# Altium PCB M2Sdurt.PcbDoc
Units mil, origin at the board's own origin, x right, y up, seen from the top; angles counter-clockwise.
Board outline 1082.68 x 1574.8 mil, 2 copper layers (Top Layer, Bottom Layer); 47 components, 22 nets, 252 pads, 107 vias.
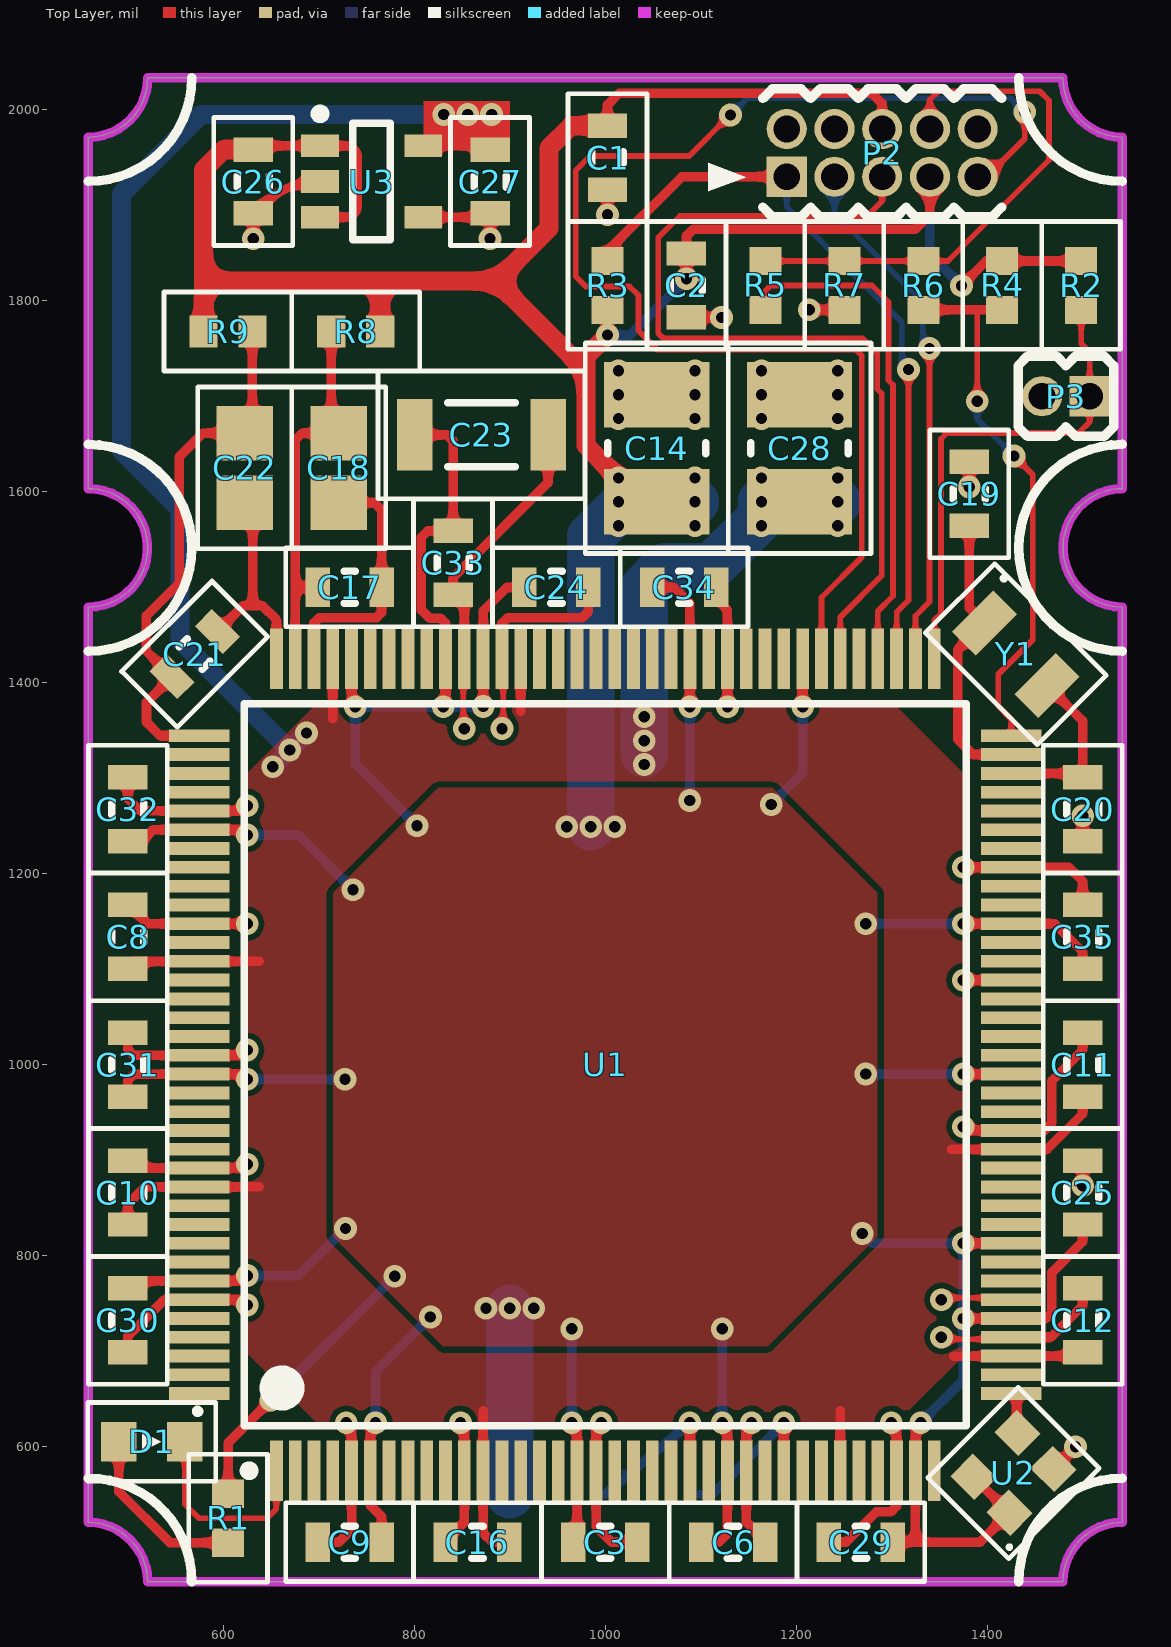
[diagram p0: Top Layer view]
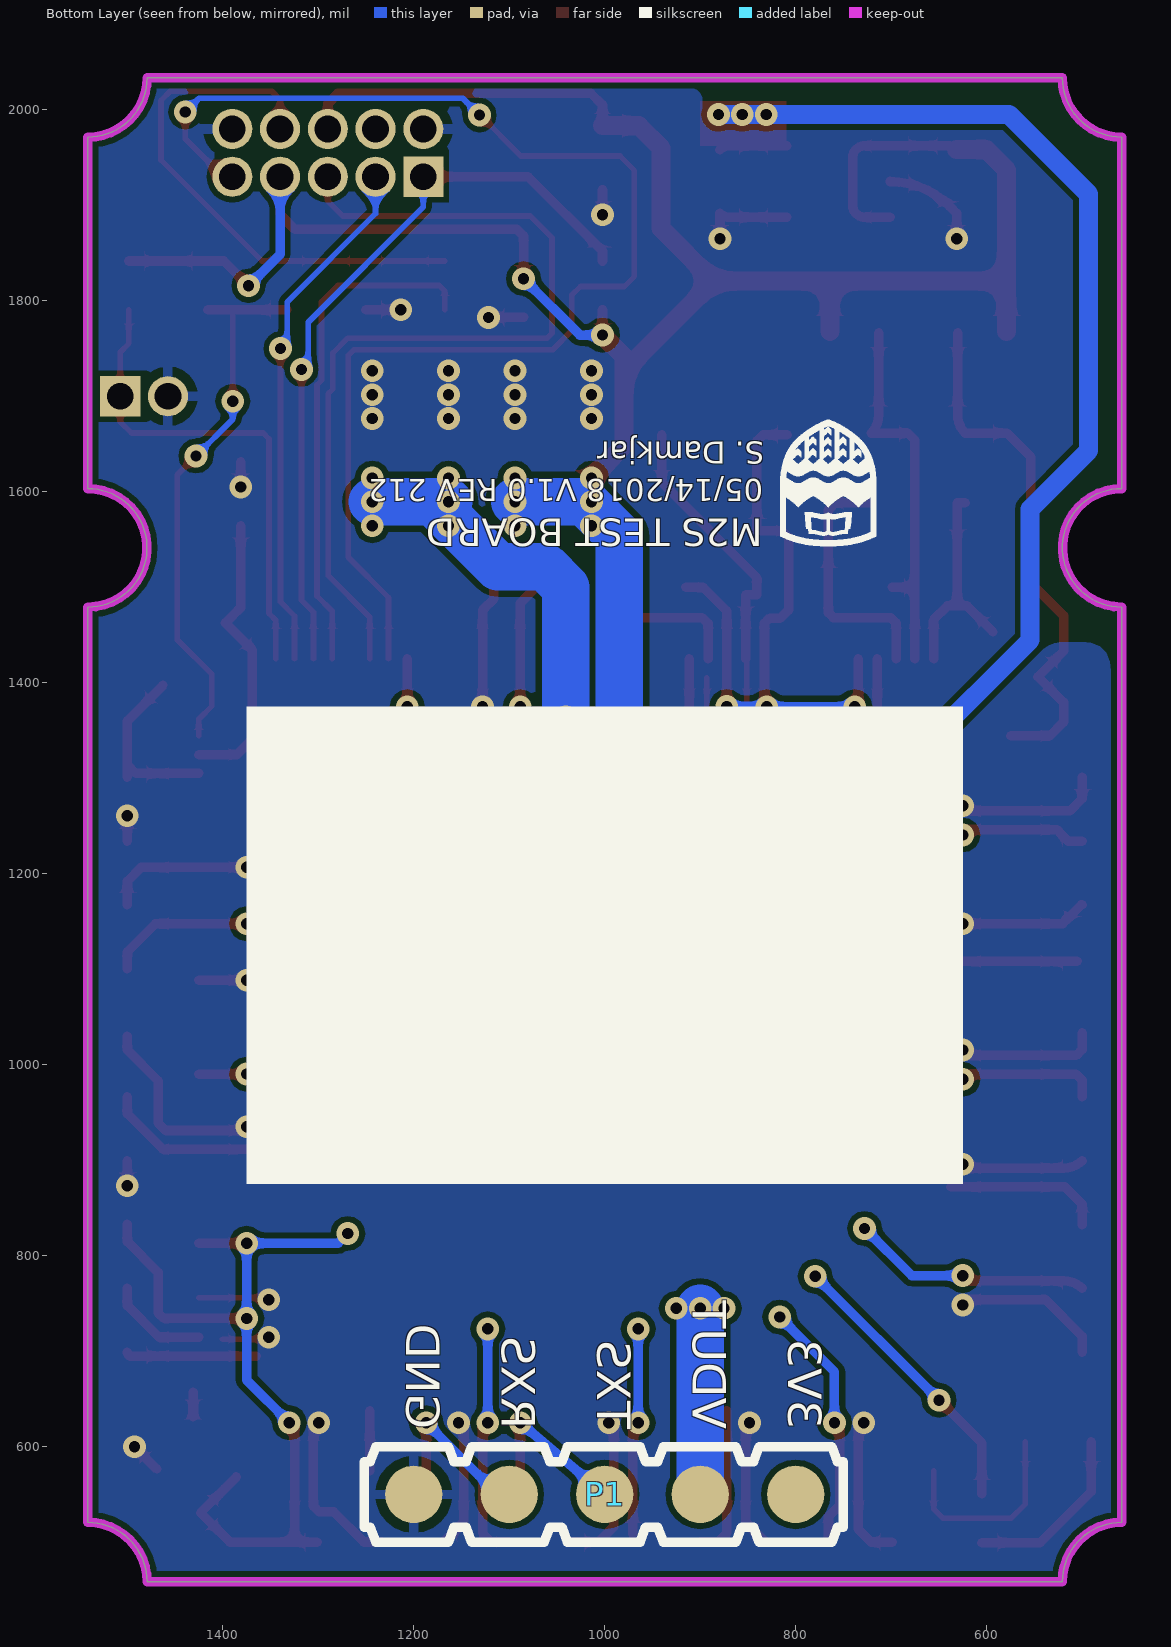
[diagram p1: Bottom Layer view, seen from below]

## Layer stack, top to bottom
Top Solder: solder mask 0.4, Solder Resist, Dk 3.5
Top Layer: signal copper 1.4
Dielectric 1: dielectric 12.6, FR-4, Dk 4.8
Bottom Layer: signal copper 1.4
Bottom Solder: solder mask 0.4, Solder Resist, Dk 3.5

## Board outline
458.66,520.67 458.66,1479.33 ccw(c458.66,1541.34) 458.66,1603.35 458.66,1971.46 ccw(c458.66,2033.46) 520.67,2033.46 1479.33,2033.46 ccw(c1541.34,2033.46) 1541.34,1971.46 1541.34,1603.35 ccw(c1541.34,1541.34) 1541.34,1479.33 1541.34,520.67 ccw(c1541.34,458.66) 1479.33,458.66 520.67,458.66 ccw(c458.66,458.66)

## Design rules (kind name [scope] priority, off if disabled: settings)
AcuteAngle [All] p1: minimum=6.00000000000000E+0001 checktracksonly=FALSE
BoardOutlineClearance [All] p1: gap=7.87 ignorepadtopadclearanceinfootprint=FALSE
Clearance [All] p1: gap=6 ignorepadtopadclearanceinfootprint=FALSE except(0: Arc-Hole Track-Hole SMDPad-Hole THPad-Hole Via-Hole Fill-Hole Poly-Hole Region-Hole Text-Hole)
Clearance ClearanceTop [OnLayer('Component Side')] p2 off: gap=4 ignorepadtopadclearanceinfootprint=FALSE except(0: Arc-Hole Track-Hole SMDPad-Hole THPad-Hole Via-Hole Fill-Hole Poly-Hole Region-Hole Text-Hole)
Clearance ClearanceTop_1 [OnLayer('Signal Layer 1')] p3 off: gap=4 ignorepadtopadclearanceinfootprint=FALSE except(0: Arc-Hole Track-Hole SMDPad-Hole THPad-Hole Via-Hole Fill-Hole Poly-Hole Region-Hole Text-Hole)
Clearance ClearanceTop_2 [OnLayer('Signal Layer 2')] p4 off: gap=4 ignorepadtopadclearanceinfootprint=FALSE except(0: Arc-Hole Track-Hole SMDPad-Hole THPad-Hole Via-Hole Fill-Hole Poly-Hole Region-Hole Text-Hole)
Clearance ClearanceBottom [OnLayer('Solder Side')] p5 off: gap=4 ignorepadtopadclearanceinfootprint=FALSE except(0: Arc-Hole Track-Hole SMDPad-Hole THPad-Hole Via-Hole Fill-Hole Poly-Hole Region-Hole Text-Hole)
Height HeightTop [OnLayer('Component Side')] p1: minheight=0 maxheight=1000 prefheight=157.48
Height HeightBottom [OnLayer('Solder Side')] p2: minheight=0 maxheight=157.48 prefheight=157.48
HoleSize [All] p1: absolutevalues=TRUE maxlimit=255.91 minlimit=7.87 maxpercent=80.000 minpercent=20.000
MinimumAnnularRing [All] p1: minimumring=4
MinimumSolderMaskSliver [All] p1: minsoldermaskwidth=3.94
PolygonConnect PolygonConnect_1 [IsVia] p1: connectstyle=Direct reliefconductorwidth=10 reliefentries=4 polygonreliefangle="90 Angle" airgapwidth=10
PolygonConnect [All] p2: connectstyle=Relief reliefconductorwidth=10 reliefentries=4 polygonreliefangle="90 Angle" airgapwidth=10
RoutingVias [All] p1: holewidth=8 width=20 viastyle="Through Hole" minholewidth=11.81 minwidth=23.81 maxholewidth=28 maxwidth=50
SMDEntry [All] p1: side=TRUE corner=FALSE anyangle=FALSE
SMDNeckDown [All] p1: percent=90.000
SMDToCorner [All] p1: distance=0
SMDToPlane [All] p1: distance=0
SilkToSilkClearance [All] p1: silktosilkclearance=6
SilkToSolderMaskClearance [IsPad] p1: minsilkscreentomaskgap=5.12 clearancetoexposedcopper=TRUE
SolderMaskExpansion [All] p1: expansion=0
UnConnectedPin [All] p1:
Width [All] p1: maxlimit=100 minlimit=6 preferedwidth=10 checkconnectedcopper=TRUE
25 further rules are at their usual default settings.

## Components (designator, comment, footprint, x,y, rotation, side; value= is the part's Value field where it differs from the comment)
C1 "Cap" TDK-CGA3E 1002.32,1950 r90 top value=0.1µF
C2 "Cap" TDK-CGA3E 1085,1816.14 r90 top value=0.1µF
C3 "Cap" TDK-CGA3E 1000,500 r180 top value=0.1µF
C6 "Cap" TDK-CGA3E 1133.86,500 r180 top value=0.1µF
C8 "Cap" TDK-CGA3E 500,1133.86 r270 top value=0.1µF
C9 "Cap" TDK-CGA3E 732.28,500 r0 top value=0.1µF
C10 "Cap" TDK-CGA3E 500,866.14 r270 top value=0.1µF
C11 "Cap" TDK-CGA3E 1500,1000 r270 top value=0.1µF
C12 "Cap" TDK-CGA3E 1500,732.28 r270 top value=0.1µF
C14 "Cap" TY-1210M 1053.91,1645.62 r90 top value=47µF
C16 "Cap" TDK-CGA3E 866.14,500 r0 top value=0.1µF
C17 "Cap" TDK-CGA3E 732.28,1500 r180 top value=0.1µF
C18 "Cap" TY-0805G 720.93,1625 r90 top value=22µF
C19 "Cap" TDK-CGA3E 1381.2,1597.92 r270 top value=22pF
C20 "Cap" TDK-CGA3E 1500,1267.72 r90 top value=22pF
C21 "Cap" TDK-CGA3E 570,1430 r225 top value=0.1µF
C22 "Cap" TY-0805G 622.5,1625 r90 top value=22µF
C23 "Cap" TDK-CGA5L 870.3,1659.67 r180 top value=10µF
C24 "Cap" TDK-CGA3E 948.82,1500 r180 top value=10000pF
C25 "Cap" TDK-CGA3E 1500,866.14 r270 top value=0.1µF
C26 "Cap" TDK-CGA3E 631.3,1925 r90 top value=1µF
C27 "Cap" TDK-CGA3E 879.33,1925 r90 top value=1µF
C28 "Cap" TY-1210M 1203.51,1645.62 r90 top value=47µF
C29 "Cap" TDK-CGA3E 1267.72,500 r0 top value=0.1µF
C30 "Cap" TDK-CGA3E 500,732.28 r90 top value=0.1µF
C31 "Cap" TDK-CGA3E 500,1000 r270 top value=0.1µF
C32 "Cap" TDK-CGA3E 500,1267.72 r270 top value=0.1µF
C33 "Cap" TDK-CGA3E 840.55,1525.59 r90 top value=0.1µF
C34 "Cap" TDK-CGA3E 1082.68,1500 r180 top value=0.1µF
C35 "Cap" TDK-CGA3E 1500,1133.86 r270 top value=0.1µF
D1 "LED" WL-150060XS75000 525,605 r0 top value=BLUE
P1 "319-10-105-30-054000" 319-10-105-30-054000 800,550 r0 bottom
P2 "Header 5x2" SLN-GRPB052 1190,1930 r0 top
P3 "Header 2" SLN-GRPB021 1507.39,1700.08 r180 top
R1 "Res3" PANA-ERJ3EK 605,525 r90 top value=10k
R2 "Res3" PANA-ERJ3EK 1498.39,1816.14 r270 top value=1k
R3 "DNP" PANA-ERJ3G 1002.32,1816.14 r90 top
R4 "Res3" PANA-ERJ3EK 1415.71,1816.14 r270 top value=10k
R5 "Jumper" PANA-ERJ3G 1167.68,1816.14 r90 top value=0
R6 "DNP" PANA-ERJ3G 1333.03,1816.14 r90 top
R7 "Res3" PANA-ERJ3EK 1250.35,1816.14 r270 top value=1k
R8 "Res3" PANA-ERJ3EK 738.64,1767.94 r0 top value=10
R9 "Res3" PANA-ERJ3EK 604.78,1767.94 r180 top value=10
U1 "M2S010-TQG144I" USEM-TQ144 1000,1000 r90 top locked
U2 "ASDMB" ABR-ASDMB 1427.5,572.5 r135 top value=10MHz
U3 "LP5907" TI-SOT25 755.32,1925 r0 top value=1.2V
Y1 "ABS07AIG" ABR-ABS07AIG 1430,1430 r315 top value=32.768kHz

## Footprints (in the part's own frame and the unit in brackets; to place one, negate y for a bottom-side part, rotate by r counter-clockwise, add the part's x,y. Pads: shape width x height; smd on the part's side, far side on the other; paste and mask are expansions set on the pad)
319-10-105-30-054000 [mil]
  round 60 smd: 1(0,0) 2(100,0) 3(200,0) 4(300,0) 5(400,0)
  silkscreen extent -50,-50 452,50, body extent -50,-50 450,50, height 87
ABR-ABS07AIG [mm] "DFN, 2-Leads, Body 1.50x3.20mm, Pitch 2.35mm, IPC Low Density"
  rect 0.9x1.55 smd: 1(-1.175,0) 2(1.175,0)
  silkscreen extent -2.1,-1.3 2.1,1.3, body extent -1.65,-0.8 1.65,0.8, height 0.9
ABR-ASDMB [mm] "DFN, 4-Leads, Body 2.00x2.50mm, Pitch 1.65mm, IPC Low Density"
  rect 0.9x0.85 smd: 1(-0.675,0.825) 2(-0.675,-0.825) 3(0.675,-0.825) 4(0.675,0.825)
  silkscreen extent -1.52,-1.7 1.53,1.7, body extent -1,-1.25 1,1.25, height 0.86
PANA-ERJ3EK [mm] "Chip Resistor, 2-Leads, Body 1.60x0.85mm, IPC High Density"
  rect 0.75x0.85 smd: 1(-0.65,0) 2(0.65,0)
  silkscreen extent -1.7,-1.05 1.7,1.05, body extent -0.88,-0.48 0.87,0.48, height 0.55
PANA-ERJ3G [mm] "Chip Resistor, 2-Leads, Body 1.60x0.85mm, IPC High Density"
  rect 0.75x0.85 smd: 1(-0.65,0) 2(0.65,0)
  silkscreen extent -1.7,-1.05 1.7,1.05, body extent -0.88,-0.48 0.87,0.48, height 0.55
SLN-GRPB021 [mil]
  rect 42x42 hole 28: 1(0,0)
  round 42 hole 28: 2(50,0)
  silkscreen extent -25,-42 75,42, body extent -25,-42 75,42, height 130
SLN-GRPB052 [mil]
  rect 42x42 hole 28: 1(0,0)
  round 42 hole 28: 2(0,50) 3(50,0) 4(50,50) 5(100,0) 6(100,50) 7(150,0) 8(150,50) 9(200,0) 10(200,50)
  silkscreen extent -25,-42 225,92, body extent -25,-42 225,92, height 130
TDK-CGA3E [mm] "Chip Capacitor, 2-Leads, Body 1.60x0.80mm, IPC Low Density"
  rect 0.65x1.05 smd: 1(-0.85,0) 2(0.85,0)
  silkscreen extent -1.7,-1.05 1.7,1.05, body extent -0.85,-0.45 0.85,0.45, height 0.8
TDK-CGA5L [mm] "Chip Capacitor, 2-Leads, Body 3.20x1.60mm, IPC Low Density"
  rect 0.95x1.9 smd: 1(-1.775,0) 2(1.775,0)
  silkscreen extent -2.75,-1.7 2.75,1.7, body extent -1.7,-0.9 1.7,0.9, height 1.6
TI-SOT25 [mm] "SOT23, 5-Leads, Body 2.90x2.80mm, Pitch 0.95mm, IPC Medium Density"
  rect 1x0.6 smd: 1(-1.375,0.95) 2(-1.375,0) 3(-1.375,-0.95) 4(1.375,-0.95) 5(1.375,0.95)
  silkscreen extent -1.5,-1.55 0.5,1.92, body extent -0.88,-1.52 0.87,1.53, height 1.45
TY-0805G [mm] "Chip Capacitor, 2-Leads, Body 2.00x1.25mm, IPC Low Density"
  rect 1.45x1.5 smd: 1(-0.925,0) 2(0.925,0)
  silkscreen extent -2.15,-1.25 2.15,1.25, body extent -1.05,-0.67 1.05,0.67, height 1.35
TY-1210M [mm] "Chip Capacitor, 2-Leads, Body 3.20x2.50mm, IPC Low Density"
  rect 1.75x2.8 smd: 1(-1.425,0) 2(1.425,0)
  silkscreen extent -2.8,-1.9 2.8,1.9, body extent -1.75,-1.35 1.75,1.35, height 2.7
USEM-TQ144 [mm] "TSQFP, 144-Leads, Body 20.00x20.00mm, Pitch 0.50mm, IPC Low Density"
  rect 1.6x0.34 smd: 1(-10.8,8.75) 2(-10.8,8.25) 3(-10.8,7.75) 4(-10.8,7.25) 5(-10.8,6.75) 6(-10.8,6.25) 7(-10.8,5.75) 8(-10.8,5.25) 9(-10.8,4.75) 10(-10.8,4.25) 11(-10.8,3.75) 12(-10.8,3.25) 13(-10.8,2.75) 14(-10.8,2.25) 15(-10.8,1.75) 16(-10.8,1.25) 17(-10.8,0.75) 18(-10.8,0.25) 19(-10.8,-0.25) 20(-10.8,-0.75) 21(-10.8,-1.25) 22(-10.8,-1.75) 23(-10.8,-2.25) 24(-10.8,-2.75) 25(-10.8,-3.25) 26(-10.8,-3.75) 27(-10.8,-4.25) 28(-10.8,-4.75) 29(-10.8,-5.25) 30(-10.8,-5.75) 31(-10.8,-6.25) 32(-10.8,-6.75) 33(-10.8,-7.25) 34(-10.8,-7.75) 35(-10.8,-8.25) 36(-10.8,-8.75) 73(10.8,-8.75) 74(10.8,-8.25) 75(10.8,-7.75) 76(10.8,-7.25) 77(10.8,-6.75) 78(10.8,-6.25) 79(10.8,-5.75) 80(10.8,-5.25) 81(10.8,-4.75) 82(10.8,-4.25) 83(10.8,-3.75) 84(10.8,-3.25) 85(10.8,-2.75) 86(10.8,-2.25) 87(10.8,-1.75) 88(10.8,-1.25) 89(10.8,-0.75) 90(10.8,-0.25) 91(10.8,0.25) 92(10.8,0.75) 93(10.8,1.25) 94(10.8,1.75) 95(10.8,2.25) 96(10.8,2.75) 97(10.8,3.25) 98(10.8,3.75) 99(10.8,4.25) 100(10.8,4.75) 101(10.8,5.25) 102(10.8,5.75) 103(10.8,6.25) 104(10.8,6.75) 105(10.8,7.25) 106(10.8,7.75) 107(10.8,8.25) 108(10.8,8.75)
  rect 0.34x1.6 smd: 37(-8.75,-10.8) 38(-8.25,-10.8) 39(-7.75,-10.8) 40(-7.25,-10.8) 41(-6.75,-10.8) 42(-6.25,-10.8) 43(-5.75,-10.8) 44(-5.25,-10.8) 45(-4.75,-10.8) 46(-4.25,-10.8) 47(-3.75,-10.8) 48(-3.25,-10.8) 49(-2.75,-10.8) 50(-2.25,-10.8) 51(-1.75,-10.8) 52(-1.25,-10.8) 53(-0.75,-10.8) 54(-0.25,-10.8) 55(0.25,-10.8) 56(0.75,-10.8) 57(1.25,-10.8) 58(1.75,-10.8) 59(2.25,-10.8) 60(2.75,-10.8) 61(3.25,-10.8) 62(3.75,-10.8) 63(4.25,-10.8) 64(4.75,-10.8) 65(5.25,-10.8) 66(5.75,-10.8) 67(6.25,-10.8) 68(6.75,-10.8) 69(7.25,-10.8) 70(7.75,-10.8) 71(8.25,-10.8) 72(8.75,-10.8) 109(8.75,10.8) 110(8.25,10.8) 111(7.75,10.8) 112(7.25,10.8) 113(6.75,10.8) 114(6.25,10.8) 115(5.75,10.8) 116(5.25,10.8) 117(4.75,10.8) 118(4.25,10.8) 119(3.75,10.8) 120(3.25,10.8) 121(2.75,10.8) 122(2.25,10.8) 123(1.75,10.8) 124(1.25,10.8) 125(0.75,10.8) 126(0.25,10.8) 127(-0.25,10.8) 128(-0.75,10.8) 129(-1.25,10.8) 130(-1.75,10.8) 131(-2.25,10.8) 132(-2.75,10.8) 133(-3.25,10.8) 134(-3.75,10.8) 135(-4.25,10.8) 136(-4.75,10.8) 137(-5.25,10.8) 138(-5.75,10.8) 139(-6.25,10.8) 140(-6.75,10.8) 141(-7.25,10.8) 142(-7.75,10.8) 143(-8.25,10.8) 144(-8.75,10.8)
  silkscreen extent -10.92,-9.6 9.6,9.6, body extent -11,-11 11,11, height 1.6
WL-150060XS75000 [mm] "Chip Diode, 2-Leads, Body 1.60x0.80mm, IPC Low Density"
  rect 0.95x1.05 smd: 1(-0.875,0) 2(0.875,0)
  silkscreen extent -1.7,-1.05 1.7,1.05, body extent -0.8,-0.4 0.8,0.4, height 0.7

## Part data
C1 C2 C3 C6 C8 C9 C10 C11 C12 C16 C17 C21 C25 C29 C30 C31 C32 C33 C34 C35: library part PC-TDK-02272, "CAP CER 0.1UF 50V X8R 0603", Manufacturer Part Number=CGA3E3X8R1H104K080AB, Supplier Part Number 1=445-12606-1-ND, Temperature Coefficient=X8R, Tolerance=±10%, Voltage - Rated=50V, Applications=Automotive, Index=2272, LatestRevisionDate=3/16/2016, LatestRevisionNote=..., PackageDescription="Radial Cap, Thru-Hole; 2 Leads; 0.3 in Pin Spacing", PackageReference="0603 (1608 Metric)", Part Number=PC-TDK-02272, Published=3/16/2016, Publisher=AlbertaSat, Supplier 1=Digi-key, Supplier Link=http://www.digikey.ca/product-search/en?keywords=445-12606-1-ND
C14 C28: library part PC-TY-00765, "CAP CER 47UF 10V X7R 1210", Manufacturer Part Number=LMK325B7476MM-TR, Supplier Part Number 1=587-2783-1-ND, Temperature Coefficient=X7R, Tolerance=±20%, Voltage-Rated=10V, Application="General Purpose", Index=765, LatestRevisionDate=3/13/2016, LatestRevisionNote=..., PackageDescription="Chip Capacitor, 2-Leads, Body 3.20x2.50mm, IPC Low Density", PackageReference="1210 (3225 Metric)", Part Number=PC-TY-00765, Published=3/13/2016, Publisher=AlbertaSat, Supplier 1=Digi-key, Supplier Link=http://www.digikey.ca/product-search/en?keywords=587-2783-1-ND
C18 C22: library part PC-TY-00700, "CAP CER 22UF 16V X5R 0805", Manufacturer Part Number=EMK212BBJ226MG-T, Supplier Part Number 1=587-3239-1-ND, Temperature Coefficient=X5R, Tolerance=±20%, Voltage-Rated=16V, Application="General Purpose", Index=700, LatestRevisionDate=2016-03-13, LatestRevisionNote=..., PackageDescription="Chip Capacitor, 2-Leads, Body 2.00x1.25mm, IPC Low Density", PackageReference="0805 (2012 Metric)", Part Number=PC-TY-00700, Published=2016-03-13, Publisher=AlbertaSat, Supplier 1=Digi-key, Supplier Link=http://www.digikey.ca/product-search/en?keywords=587-3239-1-ND
C19 C20: library part PC-TDK-01150, "CAP CER 22PF 100V NP0 0603", Manufacturer Part Number=CGA3E2NP02A220J080AA, Supplier Part Number 1=445-12357-1-ND, Temperature Coefficient=NP0, Tolerance=±5%, Voltage - Rated=100V, Applications=Automotive, Index=1150, LatestRevisionDate=2016-03-16, LatestRevisionNote=..., PackageDescription="Radial Cap, Thru-Hole; 2 Leads; 0.3 in Pin Spacing", PackageReference="0603 (1608 Metric)", Part Number=PC-TDK-01150, Published=2016-03-16, Publisher=AlbertaSat, Supplier 1=Digi-key, Supplier Link=http://www.digikey.ca/product-search/en?keywords=445-12357-1-ND
C23: library part PC-TDK-02917, "CAP CER 10UF 25V X7R 1206", Manufacturer Part Number=CGA5L1X7R1E106K160AC, Supplier Part Number 1=445-6990-1-ND, Temperature Coefficient=X7R, Tolerance=±10%, Voltage - Rated=25V, Applications=Automotive, Index=2917, LatestRevisionDate=3/16/2016, LatestRevisionNote=..., PackageDescription="Radial Cap, Thru-Hole; 2 Leads; 0.3 in Pin Spacing", PackageReference="1206 (3216 Metric)", Part Number=PC-TDK-02917, Published=3/16/2016, Publisher=AlbertaSat, Supplier 1=Digi-key, Supplier Link=http://www.digikey.ca/product-search/en?keywords=445-6990-1-ND
C24: library part PC-TDK-01883, "CAP CER 10000PF 100V C0G 0603", Manufacturer Part Number=CGA3E1C0G2A103J080AC, Supplier Part Number 1=445-172688-1-ND, Temperature Coefficient=NP0, Tolerance=±5%, Voltage - Rated=100V, Applications=Automotive, Index=1883, LatestRevisionDate=3/16/2016, LatestRevisionNote=..., PackageDescription="Radial Cap, Thru-Hole; 2 Leads; 0.3 in Pin Spacing", PackageReference="0603 (1608 Metric)", Part Number=PC-TDK-01883, Published=3/16/2016, Publisher=AlbertaSat, Supplier 1=Digi-key, Supplier Link=http://www.digikey.ca/product-search/en?keywords=445-172688-1-ND
C26 C27: library part PC-TDK-02606, "CAP CER 1UF 25V X7R 0603", Manufacturer Part Number=CGA3E1X7R1E105M080AC, Supplier Part Number 1=445-12548-1-ND, Temperature Coefficient=X7R, Tolerance=±20%, Voltage - Rated=25V, Applications=Automotive, Index=2606, LatestRevisionDate=3/16/2016, LatestRevisionNote=..., PackageDescription="Radial Cap, Thru-Hole; 2 Leads; 0.3 in Pin Spacing", PackageReference="0603 (1608 Metric)", Part Number=PC-TDK-02606, Published=3/16/2016, Publisher=AlbertaSat, Supplier 1=Digi-key, Supplier Link=http://www.digikey.ca/product-search/en?keywords=445-12548-1-ND
D1: library part 4, "LED BLUE CLEAR 0603 SMD", Manufacturer Part Number=150060BS75000, Supplier Part Number 1=732-4966-1-ND, Brightness=145mcd, LatestRevisionDate=08-Jul-2005, LatestRevisionNote="Mech Layer 1 removed.", PackageDescription="LED; 2 Leads", PackageReference=WL-150060XS75000, Part Number=4, Published=8-Jun-2000, Publisher="Altium Limited", Supplier 1=Digi-Key, Supplier Link=http://www.digikey.ca/product-search/en?keywords=732-4966-1-ND
P1: library part PP-MMM-00002, "LOW PROFILE SLC TARGET CONNECTOR", Supplier Part Number 1=ED10781-ND, Index=2, LatestRevisionDate=2018-05-10, LatestRevisionNote=..., Manufacturer Part Number=319-10-105-30-054000, Part Number=PP-MMM-00002, Published=2018-05-10, Publisher=AlbertaSat, Supplier 1=Digi-key, Supplier 2=Mouser, Supplier Link=#https://www.digikey.ca/product-detail/en/mill-max-manufacturing-corp/319-10-105-30-054000/ED10781-ND/6243896#, Supplier Part Number 2=575-3191010530054000
P2: library part PP-SLN-00017, "CONN HEADER .050\"\" 10PS DL PCB AU", Manufacturer Part Number=GRPB052VWVN-RC, Supplier Part Number 1=S9015E-05-ND, Index=17, LatestRevisionDate=2016-03-16, LatestRevisionNote=..., Number of Positions=10, Number of Rows=2, PackageDescription="CONN HEADER .050\"\" 10PS DL PCB AU", PackageReference=SLN-GRPB052, Part Number=PP-SLN-00017, Pitch="0.050\" (1.27mm)", Published=2016-03-16, Publisher=AlbertaSat, Supplier 1=Digi-key, Supplier Link=http://www.digikey.ca/product-search/en?keywords=S9015E-05-ND
P3: library part PP-SLN-00001, "CONN HEADER .050\"\" 3POS PCB GOLD", Manufacturer Part Number=GRPB021VWVN-RC, Supplier Part Number 1=S9014E-02-ND, Index=1, LatestRevisionDate=2016-03-15, LatestRevisionNote=..., Number of Positions=2, Number of Rows=1, PackageDescription="CONN HEADER .050\"\" 3POS PCB GOLD", PackageReference=SLN-GRPB021, Part Number=PP-SLN-00001, Pitch="0.050\" (1.27mm)", Published=2016-03-15, Publisher=AlbertaSat, Supplier 1=Digi-key, Supplier Link=http://www.digikey.ca/product-search/en?keywords=S9014E-02-ND
R1 R4: library part 17203, "RES SMD 10K OHM 1% 1/10W 0603", Manufacturer Part Number=ERJ-3EKF1002V, Power="0.1W, 1/10W", Supplier Part Number 1=P10.0KHCT-ND, Temperature Coefficient=±100ppm/°C, Tolerance=±1%, LatestRevisionDate=29-May-2009, LatestRevisionNote="IPC-7351 Footprint Added.", PackageDescription="Chip Resistor, 2-Leads, Body 1.60x0.80mm, IPC Low Density", PackageReference="0603 (1608 Metric)", Part Number=17203, Published=8-Jun-2000, Publisher="Altium Limited", Supplier 1=Digi-Key, Supplier Link=http://www.digikey.ca/product-search/en?keywords=P10.0KHCT-ND
R2 R7: library part 15398, "RES SMD 1K OHM 1% 1/10W 0603", Manufacturer Part Number=ERJ-3EKF1001V, Power="0.1W, 1/10W", Supplier Part Number 1=P1.00KHCT-ND, Temperature Coefficient=±100ppm/°C, Tolerance=±1%, LatestRevisionDate=29-May-2009, LatestRevisionNote="IPC-7351 Footprint Added.", PackageDescription="Chip Resistor, 2-Leads, Body 1.60x0.80mm, IPC Low Density", PackageReference="0603 (1608 Metric)", Part Number=15398, Published=8-Jun-2000, Publisher="Altium Limited", Supplier 1=Digi-Key, Supplier Link=http://www.digikey.ca/product-search/en?keywords=P1.00KHCT-ND
R3 R6: library part 19770, PackageDescription="Chip Resistor, 2-Leads, Body 1.60x0.80mm, IPC Low Density", PackageReference="0603 (1608 Metric)", Part Number=19770
R5: library part 13128, "RES SMD 0.0OHM JUMPER 1/10W 0603", Manufacturer Part Number=ERJ-3GEY0R00V, Power="0.1W, 1/10W", Supplier Part Number 1=P0.0GCT-ND, Temperature Coefficient=-, PackageDescription="Chip Resistor, 2-Leads, Body 1.60x0.80mm, IPC Low Density", PackageReference="0603 (1608 Metric)", Part Number=13128, Supplier 1=Digi-Key, Supplier Link=http://www.digikey.ca/product-search/en?keywords=P0.0GCT-ND, Tolerance=Jumper, Type=Jumper
R8 R9: library part 13237, "RES SMD 10 OHM 1% 1/10W 0603", Manufacturer Part Number=ERJ-3EKF10R0V, Power="0.1W, 1/10W", Supplier Part Number 1=P10.0HCT-ND, Temperature Coefficient=±100ppm/°C, Tolerance=±1%, LatestRevisionDate=29-May-2009, LatestRevisionNote="IPC-7351 Footprint Added.", PackageDescription="Chip Resistor, 2-Leads, Body 1.60x0.80mm, IPC Low Density", PackageReference="0603 (1608 Metric)", Part Number=13237, Published=8-Jun-2000, Publisher="Altium Limited", Supplier 1=Digi-Key, Supplier Link=http://www.digikey.ca/product-search/en?keywords=P10.0HCT-ND
U1: library part 2, "FPGA - Field Programmable Gate Array SmartFusion2", Supplier Part Number 1=494-M2S010-TQG144I, Part Number=2, Supplier 1=Mouser, Supplier Link=#https://www.mouser.ca/ProductDetail/Microsemi/M2S010-TQG144I?qs=%2fha2pyFadugM83NRZLB13twt09wJ9LTl%252bO3Kq6punH4sfPCbZRySdxgl6DnwIFRK#
U2: library part PU-ABR-00011, "OSC MEMS 10.000MHZ CMOS SMD", Manufacturer Part Number=ASDMB-10.000MHZ-XY-T, Supplier Part Number 1=535-11171-1-ND, Tolerance=±10ppm, Index=11, LatestRevisionDate=2017-10-24, LatestRevisionNote=..., PackageDescription="DFN, 4-Leads, Body 2.00x2.50mm, Pitch 1.65mm, IPC Low Density", PackageReference="4-SMD, No Lead", Part Number=PU-ABR-00011, Published=2017-10-24, Publisher=AlbertaSat, Supplier 1=Digi-key, Supplier 2=Mouser, Supplier Link=http://www.digikey.ca/product-search/en?keywords=535-11171-1-ND, Supplier Part Number 2=815-ASDMB-10-XY-T
U3: library part 22, "IC REG LINEAR 1.2V 250MA SOT23-5", Manufacturer Part Number=LP5907QMFX-1.2Q1, Supplier Part Number 1=296-40360-1-ND, PackageReference=TI-SOT25, Part Number=22, Supplier 1=Digi-Key, Supplier Link=http://www.digikey.ca/product-search/en?keywords=296-40360-1-ND
Y1: library part PY-ABR-00004, "CRYSTAL 32.768KHZ 12.5PF SMD", Equivalent Series Resistance="70 kOhm", Load Capacitance=12.5pF, Manufacturer Part Number=ABS07AIG-32.768KHZ-1-T, Supplier Part Number 1=535-13352-1-ND, Tolerance=±10ppm, Applications=Automotive, Index=4, LatestRevisionDate=2017-04-29, LatestRevisionNote=..., PackageDescription="0.126\" L x 0.059\" W (3.20mm x 1.50mm)", PackageReference="2-SMD, No Lead", Part Number=PY-ABR-00004, Published=2017-04-29, Publisher=AlbertaSat, Supplier 1=Digi-key, Supplier 2=Mouser, Supplier Link=http://www.digikey.ca/product-search/en?keywords=535-13352-1-ND, Supplier Part Number 2=815-S07AIG-32.768-1T

## Via types
v1: diameter 23.81, hole 11.81, Top Layer to Bottom Layer, tented both sides, 107 vias

## Nets (pads, with @x,y where several pads share a name; then routed paths per layer and width w, separated by ;. In a path a pad name is that pad's centre, name@x,y a point inside that pad or via, vN(x,y) a via of type N, cw(c..) or ccw(c..) an arc to the next point about the centre after c; other vN are vias at no path point)
1V2: C8.2 C10.2 C11.2 C12.2 C16.2 C27.2 C28.1 U1.12 U1.31 U1.39 U1.50 U1.95 U1.105 U1.121 U1.133 U3.5 | length 2575.9
  Top Layer w10: C10.2 500,854 518.05,872.05 U1.133 637.68,872.05 ; C8.2@504.92,1108.27 U1.121 637.68,1108.27 ; 714.57,1362.32 U1.105 ; U3.5 869.83,1962.4 cw(c869.83,1948.96) C27.2 ; 872.05,637.68 U1.12 872.05,509.54 881.59,500 C16.2 ; 911.42,1370.34 U1.95 ; U1.31 1246.06,637.68 ; 1362.32,911.42 U1.50 1462.79,911.42 1500,948.63 C11.2 ; 1365,694.88 U1.39 1496.06,694.88 ccw(c1496.06,698.82) C12.2
  Bottom Layer w20: v1(651.77,1311.96) v1(669.45,1329.64) ; v1(687.12,1347.32) v1(669.45,1329.64) ; v1(880.94,1995.15) v1(855.94,1995.15) v1(830.94,1995.15) 576.52,1995.15 493.26,1911.89 493.26,1643.13 554.43,1581.96 554.43,1444.65 v1(669.45,1329.64)
  Bottom Layer w50: v1@1040.78,1325.9 v1(1040.78,1339.39) v1(1040.78,1364.39) 1040.78,1499.68 1062.71,1521.61 1111.68,1521.61 1179.59,1589.52 ; v1(1163.51,1589.52) 1179.59,1589.52 ; v1(1243.51,1589.52) 1179.59,1589.52
  other v1: 1040.78,1314.39 1163.51,1564.52 1243.51,1564.52 1163.51,1614.52 1243.51,1614.52
3V3: C1.2 C2.2 C3.2 C6.2 C9.2 C14.1 C23.2 C24.2 C25.2 C26.2 C29.2 C30.2 C31.2 C32.2 C33.2 C34.2 C35.2 P1.2 P2.6 P2.7 R1.2 R2.1 R3.1 R4.1 R8.2 R9.2 U1.6 U1.17 U1.25 U1.35 U1.41 U1.45 U1.54 U1.62 U1.80 U1.86 U1.97 U1.99 U1.104 U1.114 U1.127 U1.138 U2.1 U2.4 U3.1 U3.3 | length 7390.9
  Top Layer w10: C30.2 cw(c519.01,746.74) 519.01,773.62 U1.138 v1@625,773.62 ; C31.2 500,983.86 506.3,990.16 U1.127 v1@625,990.16 ; C32.2 514.66,1234.25 526.48,1246.06 U1.114 v1@625,1246.06 ; R1.2 605,603.85 v1(649.86,648.71) ; C26.2 cw(c640.8,1948.96) 640.8,1962.4 U3.1 727.91,1962.4 cw(c727.91,1950) 740.32,1950 740.32,1900 cw(c727.91,1900) 727.91,1887.6 U3.3 ; v1@734.25,1375 U1.104 ; v1@753.94,625 U1.6 753.94,538.48 765.75,526.67 C9.2 ; C23.2@808.61,1659.67 834.2,1659.67 840.55,1653.32 C33.2 814.02,1559.06 807.42,1552.45 807.42,1476.24 815.96,1467.69 827.32,1467.69 832.68,1462.34 U1.99 v1@832.68,1375 ; U1.97 U1.97@872.22,1425.37 ; v1(872.22,1375.17) U1.97@872.22,1425.37 ; C24.2 896.99,1500 872.22,1475.23 U1.97@872.22,1425.37 ; C3.2@970.47,508.86 U1.17 v1@970.47,625 ; v1(1002.32,1764.14) R3.1 ; C1.2 1002.32,2005.2 1014.59,2017.46 1279.37,2017.46 1290,2006.83 P2.6 ; C34.2 1071.81,1500 1088.58,1483.23 U1.86 v1(1088.58,1375) ; v1(1085,1823.19) C2.2 1085,1867.98 1091.91,1874.89 1324.36,1874.89 1340,1890.53 P2.7 ; C6.2 1118.9,500 1127.95,509.06 U1.25 v1@1127.95,625 ; v1(1206.69,1375) U1.80 ; C29.2 1324.8,500 ; v1@1324.8,625 U1.35 1324.8,500 ; v1(1372.99,1815.74) 1398.98,1841.73 R4.1 R2.1 ; v1(1375,734.25) U1.41 1461.81,734.25 1467.69,740.13 1467.69,782.46 1500,814.77 C25.2 ; v1(1375,812.99) U1.45 ; v1(1375,990.16) U1.54 ; v1(1375,1147.64) U1.62 1470.66,1147.64 1500,1118.3 C35.2 ; U2.4 1398.27,555.8 U2.1 1392.58,500 1324.8,500
  Top Layer w20: R9.2 579.19,1820.64 ; C26.2 600.43,1958.46 579.19,1937.23 579.19,1820.64 ; R8.2 764.23,1820.64 ; v1(1002.32,1764.14) 979.68,1741.5 979.68,1726.67 ; C1.2 964.27,1983.46 941.07,1960.27 941.07,1876.01 885.7,1820.64 ; v1(1013.91,1614.52) 979.68,1648.74 979.68,1726.67 ; 579.19,1820.64 764.23,1820.64 ; 764.23,1820.64 885.7,1820.64 ; 885.7,1820.64 979.68,1726.67
  Bottom Layer w10: v1(625,779.12) 678.43,779.12 v1(727.82,828.51) ; v1(625,984.66) v1@723.33,984.66 ; v1(625,1240.56) 678.43,1240.56 v1(735.82,1183.18) ; v1(649.86,648.71) v1(779.6,778.45) ; v1(759.44,625) 759.44,678.43 v1(816.82,735.82) ; v1(802.84,1250.19) 738.25,1314.78 v1(738.25,1375) v1(830.38,1375) 830.55,1375.17 v1(872.22,1375.17) ; v1(964.97,625) v1(964.97,723.33) ; v1(1002.32,1764.14) 1025.94,1764.14 v1(1085,1823.19) ; v1(1088.58,1276.67) v1(1088.58,1375) ; v1(1122.45,625) v1(1122.45,723.33) ; v1(1173.71,1272.53) 1206.69,1305.51 v1(1206.69,1375) ; v1(1269.14,823.17) 1279.32,812.99 v1(1375,812.99) v1(1375,734.25) 1375,669.7 v1(1330.3,625) ; v1@1276.67,990.16 v1(1375,990.16) ; v1@1276.67,1147.64 v1(1375,1147.64) ; P2.7 1340,1848.73 v1(1372.99,1815.74)
  Bottom Layer w50: P1.2 v1(900,744.89) ; v1(984.78,1249.3) 984.78,1553.38 1020.91,1589.52 v1(1093.91,1589.52)
  other v1: 875,744.89 925,744.89 727.33,984.66 1272.67,990.16 1272.67,1147.64 959.78,1249.3 1009.78,1249.3 1013.91,1564.52 1093.91,1564.52 1013.91,1589.52 1093.91,1614.52
BLINKY: D1.2 U1.1 | length 211.3
  Top Layer w6: D1.2 559.45,539.92 574.37,525 645.6,525 655.51,534.91 U1.1
DEVRST_N: R4.2 R6.1 U1.72 | length 574.1
  Top Layer w6: 1388.06,1790.55 1389.57,1789.04 v1(1389.57,1694.94) ; U1.72 1425.2,1361.89 1411.46,1375.63 1411.46,1408.84 1447.7,1445.08 1447.7,1617.95 v1(1428.07,1637.57)
  Top Layer w10: R6.1 1388.06,1790.55 1398.98,1790.55 R4.2
  Bottom Layer w6: v1(1389.57,1694.94) 1389.57,1676.07 v1(1428.07,1637.57)
FPGA_CLK: U1.37 U2.3 | length 25.6
  Top Layer w10: U2.3@1430.9,631.13 U1.37@1430.9,656.74
GND: C1.1 C2.1 C3.1 C6.1 C8.1 C9.1 C10.1 C11.1 C12.1 C14.2 C16.1 C19.1 C20.1 C23.1 C24.1 C25.1 C26.1 C27.1 C28.2 C29.1 C30.1 C31.1 C32.1 C33.1 C34.1 C35.1 P1.5 P2.2 P2.10 P3.2 R7.2 U1.5 U1.11 U1.18 U1.26 U1.34 U1.40 U1.42 U1.51 U1.59 U1.65 U1.84 U1.96 U1.98 U1.113 U1.119 U1.126 U1.132 U1.139 U2.2 U3.2 U3.4 | length 3219.6
  Top Layer w6: v1@851.31,1350 U1.98@851.31,1425.2 ; v1@893.13,1355 U1.96@893.13,1405.2 ; v1@1352,712.57 U1.40@1400.2,712.57 ; v1@1352,755.94 U1.42@1425.2,755.94
  Top Layer w10: C30.1 500,715.59 538.34,753.94 U1.139 v1@625,753.94 ; C10.1 ccw(c519.01,918.62) 519.01,891.73 U1.132 v1@625,891.73 ; C31.1 500,1015.9 506.06,1009.84 U1.126 v1@625,1009.84 ; C8.1 500.89,1167.32 520.57,1147.64 U1.119 v1(625,1147.64) ; C32.1 500,1278.52 512.77,1265.75 U1.113 v1@625,1265.75 ; v1(631.3,1865.12) C26.1 639.01,1899.25 cw(c701.18,1837.08) U3.2 ; C9.1 720.94,500 734.25,513.31 U1.5 v1@734.25,625 ; U3.4 869.83,1887.6 ccw(c869.83,1901.04) C27.1 v1(879.33,1865.12) ; C16.1 832.68,501.16 852.36,520.85 U1.11 v1@852.36,625 ; U1.98 852.36,1492.13 C33.1 840.55,1510.03 940.18,1609.67 C23.1 ; U1.96 891.73,1462.1 897.96,1468.33 976.11,1468.33 982.28,1474.51 C24.1 ; U1.18 U1.18@990.33,574.63 ; v1@990.33,624.83 U1.18@990.33,574.63 ; v1(1002.32,1890.12) C1.1 ; C3.1 1006.68,500 990.33,516.34 U1.18@990.33,574.63 ; C2.1 v1(1121.67,1782.66) ; C34.1 1116.14,1487.9 1127.95,1476.09 U1.84 v1(1127.95,1375) ; v1@1147.64,625 U1.26 1147.64,521.27 1167.32,501.59 C6.1 ; v1(1213.68,1790.57) R7.2@1250.33,1790.57 ; C29.1 1252.16,500 1283.83,531.67 1299.02,531.67 1305.12,537.76 U1.34 v1@1305.12,625 ; v1@1350,714.57 v1(1352,714.57) ; v1@1375,931.1 U1.51 1459.85,931.1 1467.69,938.95 1467.69,983.25 1500,1015.56 C11.1@1500,1029.53 ; v1(1375,1088.58) U1.59 ; v1(1375,1206.69) U1.65 1485.49,1206.69 1500,1192.18 C35.1 ; v1(1381.2,1604.97) C19.1 ; U1.40 1466.73,714.57 1500,747.84 C12.1 ; U2.2 v1(1492.5,599.92) ; v1(1500,873.2) C25.1 ; C20.1 v1(1500,1260.66)
  other v1: 728.75,625 848.36,625 995.66,625 1153.14,625 1299.62,625 625,748.44 1352,753.94 625,895.73 1375,935.1 625,1015.34 625,1271.25 852.36,1352 891.73,1352 1013.91,1676.72 1093.91,1676.72 1163.51,1676.72 1243.51,1676.72 1013.91,1701.72 1093.91,1701.72 1163.51,1701.72 1243.51,1701.72 1013.91,1726.72 1093.91,1726.72 1163.51,1726.72 1243.51,1726.72
JTAG_TCK: P2.1 R3.2 U1.75 | length 798.1
  Top Layer w6: U1.75 1305.12,1473.87 1317.63,1486.38 v1(1317.63,1728.11)
  Top Layer w10: R3.2 1002.32,1852.1 1080.23,1930 P2.1 P2.1@1184.41,1924.41
  Bottom Layer w6: P2.1 1190,1898.25 1310.58,1777.66 v1@1310.58,1728.11
JTAG_TDI: P2.9 U1.79 | length 1408.4
  Top Layer w6: v1@1130.74,1994.56 1087.94,1951.75 984.09,1951.75 968.97,1936.63 968.97,1825.58 979.44,1815.11 1025.37,1815.11 1034.67,1805.81 1034.67,1768.6 1054.39,1748.88 1262.54,1748.88 1268.53,1742.9 1268.53,1531.56 1226.38,1489.41 U1.79 ; P2.9 1399.58,1930 1439.35,1969.76 v1(1439.35,1997.7)
  Bottom Layer w6: v1(1131.09,1994.56) 1148.76,2012.22 1424.83,2012.22 v1(1439.35,1997.7) ; P2.9 P2.9@1393.89,1926.11
JTAG_TDO: P2.3 U1.74 | length 552.1
  Top Layer w6: U1.74 1324.8,1470.09 1339.53,1484.82 1339.53,1742.97 v1@1332.49,1750.01
  Bottom Layer w6: P2.3 1240,1891.35 1332.49,1798.87 v1@1332.49,1750.01
  other v1: 1339.53,1750.01
JTAG_TMS: P2.5 U1.78 | length 954.1
  Top Layer w6: U1.78 1246.06,1468.63 1289.44,1512 1289.44,1702.85 1284.72,1707.57 1284.72,1745.5 1269.34,1760.88 1060.6,1760.88 1055.33,1766.15 1055.33,1866.13 1078.09,1888.89 1274.28,1888.89 1290,1904.61 P2.5
JTAG_TRSTB: R5.1 U1.76 | length 540.9
  Top Layer w6: R5.1 1167.68,1810.65 1173.22,1816.19 1279.4,1816.19 1296.72,1798.87 1296.72,1716.73 1301.44,1712.02 1301.44,1490.85 1285.43,1474.85 U1.76
NetC17_1: C17.1 C18.1 U1.106 | length 268.2
  Top Layer w10: U1.106 694.88,1462.59 700.62,1468.33 760.59,1468.33 765.75,1473.48 C17.1 765.75,1580.98 758.15,1588.58 C18.1
NetC17_2: C17.2 C18.2 R8.1 U1.107 | length 408.6
  Top Layer w10: U1.107 675.2,1500 ; C17.2 675.2,1500 ; R8.1@713.05,1766.74 713.05,1680.43 ccw(c739.93,1680.43) C18.2 682.64,1661.42 675.2,1653.97 675.2,1500
NetC19_2: C19.2 U1.71 Y1.1 | length 304.7
  Top Layer w10: C19.2 1381.2,1478.8 Y1.1 1369.02,1434.44 1369.02,1341.01 1385.22,1324.8 U1.71
NetC20_2: C20.2 U1.70 Y1.2 | length 190
  Top Layer w10: U1.70 1491.14,1305.12 1500,1313.98 ; Y1.2 1500,1360 1500,1313.98 ; C20.2 1500,1313.98
NetC21_1: C21.1 C22.1 U1.108 | length 236.3
  Top Layer w10: C21.1 620.51,1480.51 630.84,1480.51 ; C22.1 630.84,1588.58 630.84,1480.51 ; U1.108 655.51,1466.18 641.18,1480.51 630.84,1480.51
NetC21_2: C21.2 C22.2 R9.1 U1.109 | length 562.1
  Top Layer w10: U1.109 533.82,1344.49 519.49,1358.82 519.49,1379.49 C21.2 519.25,1433.42 519.25,1470.07 553.94,1504.75 553.94,1636.83 578.53,1661.42 C22.2 ccw(c603.49,1680.43) 630.37,1680.43 R9.1@630.37,1766.74
NetD1_1: D1.1 R1.1 | length 188.8
  Top Layer w10: D1.1 490.55,552.78 543.92,499.41 R1.1
NetP2_8: P2.8 R5.2 R6.2 R7.1 | length 566.3
  Top Layer w6: R5.2 R6.2 1358.95,1841.73 1464.68,1947.45 1464.68,2009.9 1455.11,2019.46 1348.67,2019.46 1340,2010.8 P2.8
NetP3_1: P3.1 R2.2 U1.73 | length 517.4
  Top Layer w6: U1.73 1344.49,1465.42 1351.53,1472.47 1351.53,1655.38 1357.66,1661.51 1495.73,1661.51 1507.39,1673.18 P3.1 1507.39,1746.26 1498.39,1755.27 R2.2
UART_RX: P1.4 U1.28 | length 168.3
  Top Layer w10: U1.28 v1(1187.01,625)
  Bottom Layer w10: P1.4 1112.01,550 v1(1187.01,625)
UART_TX: P1.3 U1.23 | length 166.3
  Top Layer w10: U1.23 v1(1088.58,625)
  Bottom Layer w10: P1.3 v1(1088.58,625)
pads on no net: P1.1 P2.4 U1.2 U1.3 U1.4 U1.7 U1.8 U1.9 U1.10 U1.13 U1.14 U1.15 U1.16 U1.19 U1.20 U1.21 U1.22 U1.24 U1.27 U1.29 U1.30 U1.32 U1.33 U1.36 U1.38 U1.43 U1.44 U1.46 U1.47 U1.48 U1.49 U1.52 U1.53 U1.55 U1.56 U1.57 U1.58 U1.60 U1.61 U1.63 U1.64 U1.66 U1.67 U1.68 U1.69 U1.77 U1.81 U1.82 U1.83 U1.85 U1.87 U1.88 U1.89 U1.90 U1.91 U1.92 U1.93 U1.94 U1.100 U1.101 U1.102 U1.103 U1.110 U1.111 U1.112 U1.115 U1.116 U1.117 U1.118 U1.120 U1.122 U1.123 U1.124 U1.125 U1.128 U1.129 U1.130 U1.131 U1.134 U1.135 U1.136 U1.137 U1.140 U1.141 U1.142 U1.143 U1.144

## Polygon pours and split planes (outlines as drawn)
1V2 on Top Layer "Top Layer-1V2" (solid, pour order 2): 622.05,1302.05 697.95,1377.95 1302.05,1377.95 1377.95,1302.05 1377.95,697.95 1302.05,622.05 700.79,622.05 622.05,700.79
3V3 on Top Layer "Top Layer-3V3" (solid, pour order 0): 715,1180 825,1290 1175,1290 1285,1180 1285,820 1170,705 830,705 715,820
GND on Bottom Layer "Bottom Layer-GND" (solid, remove dead copper, pour order 4): 408.11,386.11 408.11,1989.48 516.2,2097.58 1471.02,2097.58 1590.37,1978.22 1590.37,485.19 1493.54,388.36

## Keep-outs
Keep-Out Layer:
  the board outline again, w10

## Other copper
Top Layer:
  rectangle net 1V2: 809.45,1962.4 900.05,2009.24
Bottom Layer:
  pour cut-out: 542.9,1433.11 ccw(c520.02,1410.24) 520.02,1442.59 495.89,1442.59 ccw(c495.89,1417.23) 470.53,1417.23 470.53,2023.05 cw(c493.61,2023.05) 493.61,2046.13 887.97,2046.13 cw(c887.97,2023.3) 910.8,2023.3 ccw(c910.8,2010.31) 897.81,2010.31 897.81,2002.14 cw(c896.14,2002.14) 896.14,2000.46 581.84,2000.46 493.26,1911.89 493.26,1643.13 555.93,1580.47 555.93,1462.45

## Silkscreen, mask and mechanical layers (free items; w line width, h text height)
Top Overlay:
  region: 1147.78,1929.64 1107.78,1944.64 1107.78,1914.64
  lines w10: 458.66,566.93 cw(c458.66,458.66) 566.93,458.66 ; 458.66,1433.07 ccw(c458.66,1541.34) 458.66,1649.61 ; 458.66,1925.2 ccw(c458.66,2033.46) 566.93,2033.46 ; 1433.07,458.66 cw(c1541.34,458.66) 1541.34,566.93 ; 1433.07,2033.46 ccw(c1541.34,2033.46) 1541.34,1925.2 ; 1541.34,1433.07 cw(c1541.34,1541.34) 1541.34,1649.61
Bottom Overlay:
  drawing of 1861 lines, arcs and shapes, not listed
  text "S. Damkjar" at 832.92,1660.04 h40 r180
  text "05/14/2018 V1.0 REV 212" at 834.01,1621.2 h40 r180
  text "M2S TEST BOARD" at 834.25,1581.63 h50 r180
  text "3V3" at 819.47,618.04 h60 r90
  text "VDUT" at 919.47,618.04 h60 r90
  text "TXS" at 1019.47,618.04 h60 r90
  text "RXS" at 1119.47,618.04 h60 r90
  text "GND" at 1219.47,618.04 h60 r90